# Altium PCB 28Pins_Schematic_V1I1_PCB.PcbDoc (part 2 of 5)
Units mm, origin at the board's own origin, x right, y up, seen from the top; angles counter-clockwise.
Board outline 68.58 x 53.34 mm, 2 copper layers (L1, L2), stack 1.67 mm thick; 106 components, 72 nets, 323 pads, 86 vias.
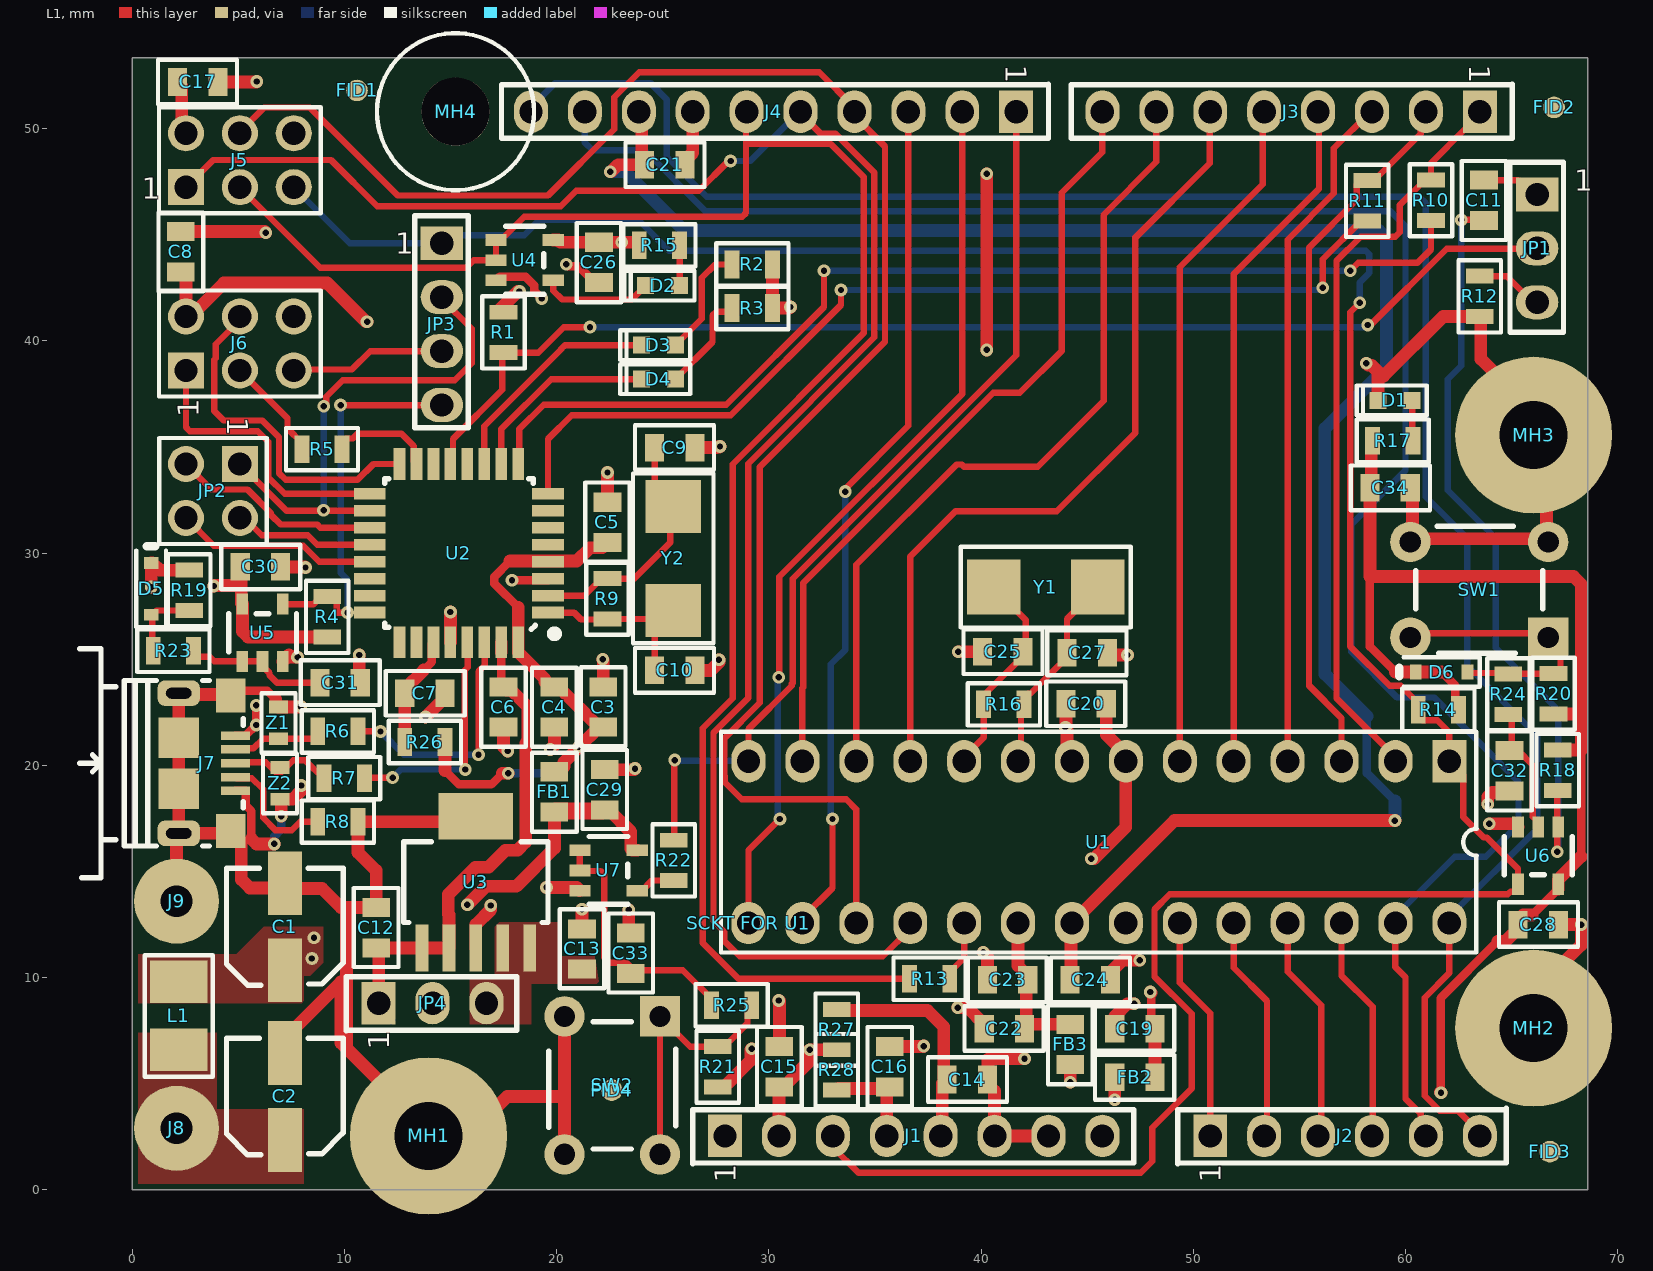
[diagram p0: L1 view]

## Part data (continued)
D5 D6: "Small Signal Schottky Diode, Single, 30 V, 200 Ma, 800 Mv, 600 Ma, 150 C", Average Rectified Current=200mA, Breakdown Voltage=30V, Capacitance=10pF, Forward Voltage=240mV, Manufacturer=onsemi, Manufacturer Lifecycle Status=ACTIVE, Max Forward Surge Current (Ifsm)=600mA, Max Operating Temperature=150°C, Max Power Dissipation=200mW, Max Reverse Leakage Current=2µA, Min Operating Temperature=-55°C, Supplier Part Number 1=BAT54HT1GOSDKR-ND, Category="Schottky Diodes", China RoHS=Compliant, ComponentLink1Description=https://datasheet.octopart.com:443/BAT54HT1G-ON-Semiconductor-datasheet-37002776.pdf?src-supplier=Master+Electronics, ComponentLink1URL=https://datasheet.octopart.com:443/BAT54HT1G-ON-Semiconductor-datasheet-37002776.pdf?src-supplier=Master+Electronics, ComponentLink2Description=https://datasheet.octopart.com:443/BAT54HT1G-onsemi-datasheet-189128040.pdf?src-supplier=Master+Electronics, ComponentLink2URL=https://datasheet.octopart.com:443/BAT54HT1G-onsemi-datasheet-189128040.pdf?src-supplier=Master+Electronics, ComponentLink3Description=https://datasheet.octopart.com:443/BAT54HT1G-onsemi-datasheet-180957868.pdf?src-supplier=IHS, ComponentLink3URL=https://datasheet.octopart.com:443/BAT54HT1G-onsemi-datasheet-180957868.pdf?src-supplier=IHS, ComponentLink4Description=https://datasheet.octopart.com:443/BAT54HT1G-Fairchild-Semiconductor-datasheet-21199251.pdf?src-supplier=IHS, ComponentLink4URL=https://datasheet.octopart.com:443/BAT54HT1G-Fairchild-Semiconductor-datasheet-21199251.pdf?src-supplier=IHS, ComponentLink5Description=https://datasheet.octopart.com:443/BAT54HT1G-ON-Semiconductor-datasheet-7594180.pdf?src-supplier=onsemi, ComponentLink5URL=https://datasheet.octopart.com:443/BAT54HT1G-ON-Semiconductor-datasheet-7594180.pdf?src-supplier=onsemi, ComponentLink6Description=https://datasheet.octopart.com:443/BAT54HT1G-onsemi-datasheet-181958672.pdf?src-supplier=Newark, ComponentLink6URL=https://datasheet.octopart.com:443/BAT54HT1G-onsemi-datasheet-181958672.pdf?src-supplier=Newark, ComponentLink7Description=https://datasheet.octopart.com:443/BAT54HT1G-ON-Semiconductor-datasheet-11728044.pdf?src-supplier=Newark, ComponentLink7URL=https://datasheet.octopart.com:443/BAT54HT1G-ON-Semiconductor-datasheet-11728044.pdf?src-supplier=Newark, ComponentLink8Description=https://datasheet.octopart.com:443/BAT54HT1G-Fairchild-Semiconductor-datasheet-67878757.pdf?src-supplier=Newark, ComponentLink8URL=https://datasheet.octopart.com:443/BAT54HT1G-Fairchild-Semiconductor-datasheet-67878757.pdf?src-supplier=Newark, ComponentLink9Description=https://datasheet.octopart.com:443/BAT54HT1G-Fairchild-Semiconductor-datasheet-67910283.pdf?src-supplier=Newark, ComponentLink9URL=https://datasheet.octopart.com:443/BAT54HT1G-Fairchild-Semiconductor-datasheet-67910283.pdf?src-supplier=Newark, ComponentLink10Description=https://datasheet.octopart.com:443/BAT54HT1G-Fairchild-Semiconductor-datasheet-12526481.pdf?src-supplier=Fairchild+Semiconductor, ComponentLink10URL=https://datasheet.octopart.com:443/BAT54HT1G-Fairchild-Semiconductor-datasheet-12526481.pdf?src-supplier=Fairchild+Semiconductor, ComponentLink11Description=https://sigma.octopart.com:443/17344476/technical_drawing/Fairchild-Semiconductor-BAT54HT1G.pdf?src-supplier=Fairchild+Semiconductor, ComponentLink11URL=https://sigma.octopart.com:443/17344476/technical_drawing/Fairchild-Semiconductor-BAT54HT1G.pdf?src-supplier=Fairchild+Semiconductor, ComponentLink12Description=https://datasheet.octopart.com:443/BAT54HT1G-ON-Semiconductor-datasheet-78857375.pdf?src-supplier=element14+APAC, ComponentLink12URL=https://datasheet.octopart.com:443/BAT54HT1G-ON-Semiconductor-datasheet-78857375.pdf?src-supplier=element14+APAC, ComponentLink13Description=https://datasheet.octopart.com:443/BAT54HT1G-Fairchild-Semiconductor-datasheet-14041551.pdf?src-supplier=iiiC, ComponentLink13URL=https://datasheet.octopart.com:443/BAT54HT1G-Fairchild-Semiconductor-datasheet-14041551.pdf?src-supplier=iiiC, ComponentLink14Description=https://datasheet.octopart.com:443/BAT54HT1G-ON-Semiconductor-datasheet-9904951.pdf?src-supplier=RS+(Formerly+Allied+Electronics), ComponentLink14URL=https://datasheet.octopart.com:443/BAT54HT1G-ON-Semiconductor-datasheet-9904951.pdf?src-supplier=RS+(Formerly+Allied+Electronics), ComponentLink15Description=https://datasheet.octopart.com:443/BAT54HT1G-ON-Semiconductor-datasheet-8442547.pdf?src-supplier=Jameco, ComponentLink15URL=https://datasheet.octopart.com:443/BAT54HT1G-ON-Semiconductor-datasheet-8442547.pdf?src-supplier=Jameco, ComponentLink16Description=https://datasheet.octopart.com:443/BAT54HT1G-Fairchild-datasheet-1483.pdf?src-supplier=DigiKey, ComponentLink16URL=https://datasheet.octopart.com:443/BAT54HT1G-Fairchild-datasheet-1483.pdf?src-supplier=DigiKey, ComponentLink17Description=https://datasheet.octopart.com:443/BAT54HT1G-Fairchild-Semiconductor-datasheet-68652800.pdf?src-supplier=Farnell, ComponentLink17URL=https://datasheet.octopart.com:443/BAT54HT1G-Fairchild-Semiconductor-datasheet-68652800.pdf?src-supplier=Farnell, ComponentLink18Description=http://sigma.octopart.com:80/15540786/rohs_certificate/ON-Semiconductor-BAT54HT1G.pdf?src-supplier=Compliance+Statements, ComponentLink18URL=http://sigma.octopart.com:80/15540786/rohs_certificate/ON-Semiconductor-BAT54HT1G.pdf?src-supplier=Compliance+Statements, ComponentLink19Description=http://sigma.octopart.com:80/15674218/materials_sheet/ON-Semiconductor-BAT54HT1G.csv?src-supplier=Compliance+Statements, ComponentLink19URL=http://sigma.octopart.com:80/15674218/materials_sheet/ON-Semiconductor-BAT54HT1G.csv?src-supplier=Compliance+Statements, ComponentLink20Description=http://sigma.octopart.com:80/150604023/rohs_statement/ON-Semiconductor-BAT54HT1G.pdf?src-supplier=Compliance+Statements, ComponentLink20URL=http://sigma.octopart.com:80/150604023/rohs_statement/ON-Semiconductor-BAT54HT1G.pdf?src-supplier=Compliance+Statements, ComponentLink21Description=http://sigma.octopart.com:80/17344520/reach_statement/Fairchild-Semiconductor-BAT54HT1G.pdf?src-supplier=Compliance+Statements, ComponentLink21URL=http://sigma.octopart.com:80/17344520/reach_statement/Fairchild-Semiconductor-BAT54HT1G.pdf?src-supplier=Compliance+Statements, ComponentLink22Description=http://sigma.octopart.com:80/17344521/materials_sheet/Fairchild-Semiconductor-BAT54HT1G.pdf?src-supplier=Compliance+Statements, ComponentLink22URL=http://sigma.octopart.com:80/17344521/materials_sheet/Fairchild-Semiconductor-BAT54HT1G.pdf?src-supplier=Compliance+Statements, ComponentLink23Description=http://sigma.octopart.com:80/33050028/reach_statement/Fairchild-Semiconductor-BAT54HT1G.pdf?src-supplier=Compliance+Statements, ComponentLink23URL=http://sigma.octopart.com:80/33050028/reach_statement/Fairchild-Semiconductor-BAT54HT1G.pdf?src-supplier=Compliance+Statements, ComponentLink24Description=http://sigma.octopart.com:80/33050038/materials_sheet/Fairchild-Semiconductor-BAT54HT1G.pdf?src-supplier=Compliance+Statements, ComponentLink24URL=http://sigma.octopart.com:80/33050038/materials_sheet/Fairchild-Semiconductor-BAT54HT1G.pdf?src-supplier=Compliance+Statements, ComponentLink25Description=http://sigma.octopart.com:80/reach_statement/ON-Semiconductor-company-79.pdf?src-supplier=Compliance+Statements, ComponentLink25URL=http://sigma.octopart.com:80/reach_statement/ON-Semiconductor-company-79.pdf?src-supplier=Compliance+Statements, ComponentLink26Description=http://sigma.octopart.com:80/reach_statement/Fairchild-Semiconductor-company-9.pdf?src-supplier=Compliance+Statements, ComponentLink26URL=http://sigma.octopart.com:80/reach_statement/Fairchild-Semiconductor-company-9.pdf?src-supplier=Compliance+Statements, ComponentLink27Description=http://sigma.octopart.com:80/rohs_statement/Fairchild-Semiconductor-company-10.pdf?src-supplier=Compliance+Statements, ComponentLink27URL=http://sigma.octopart.com:80/rohs_statement/Fairchild-Semiconductor-company-10.pdf?src-supplier=Compliance+Statements, ComponentLink28Description=http://sigma.octopart.com:80/rohs_statement/Fairchild-Semiconductor-company-11.pdf?src-supplier=Compliance+Statements, ComponentLink28URL=http://sigma.octopart.com:80/rohs_statement/Fairchild-Semiconductor-company-11.pdf?src-supplier=Compliance+Statements, ComponentLink29Description=https://octopart.com:443/opatz8j6/c1?t=3ZzLXgp189lN6qr6PJ87cZKlXV5_f8kPbvVlEFRlOjs67Qhaku54BR-AgYIUP67cujvA7wDJKydF2OiBQY6EYp4nMlrwEMh3oQTbWkdpaRVxum8woBCyxPnJ0sWb7LRm_eEFT5Fosxf2ScgU6zJALxGwwzG5iEq8gNK_bSef5qdATf5-mKg7ZOWVi3aB1zkTrJTwfRWh1CT_VDojxVyUEyHMmg70DbBu-Ut1n5vHLUqdX7RI8hTTVEtl94J2wzp4T5HhO6ImYDlBu9_FMTDHXSlJWvsKofChh7O756G4mXutxmrsS2trYwzw5_jJNJSRrFQky3Dqp2UF_-WeSnumXBPkE1b1s1RoEA&src-supplier=Compliance+Statements, ComponentLink29URL=https://octopart.com:443/opatz8j6/c1?t=3ZzLXgp189lN6qr6PJ87cZKlXV5_f8kPbvVlEFRlOjs67Qhaku54BR-AgYIUP67cujvA7wDJKydF2OiBQY6EYp4nMlrwEMh3oQTbWkdpaRVxum8woBCyxPnJ0sWb7LRm_eEFT5Fosxf2ScgU6zJALxGwwzG5iEq8gNK_bSef5qdATf5-mKg7ZOWVi3aB1zkTrJTwfRWh1CT_VDojxVyUEyHMmg70DbBu-Ut1n5vHLUqdX7RI8hTTVEtl94J2wzp4T5HhO6ImYDlBu9_FMTDHXSlJWvsKofChh7O756G4mXutxmrsS2trYwzw5_jJNJSRrFQky3Dqp2UF_-WeSnumXBPkE1b1s1RoEA&src-supplier=Compliance+Statements, ComponentLink30Description=https://octopart.com:443/opatz8j6/c1?t=lBzE7Y_ANC3iKkVfA73D4dlUe9RzUzslg6-n76YkGyK5ZeirIztsOHEAxBuNpZVXn9OPcjJdutwzpwHYmI55AnVX10rWYzr5fzPXsvkuk1qDsHog-eNghcNEOv3ETbmy9xFgtDtXVOkXjgojvr30ZGnwQe-SuvxUL4clDHTA93ejFh2pe_CChVNWQhZ3JHhTB-yEKWS8Lk-05QM7OneGtI4KrximWxWcmOzdFy60giGSBPWEO7T8nN0V9HRoymEUY1Z6I1MqG8eWVSRdVHHcB0Awo462-FC4YrhEYLfSGAwDR7gEXYuBkBsslNEJyDaBtgtFiPHlHtStHOe6ouHvctlaLh4vxXNSgpM&src-supplier=Compliance+Statements, ComponentLink30URL=https://octopart.com:443/opatz8j6/c1?t=lBzE7Y_ANC3iKkVfA73D4dlUe9RzUzslg6-n76YkGyK5ZeirIztsOHEAxBuNpZVXn9OPcjJdutwzpwHYmI55AnVX10rWYzr5fzPXsvkuk1qDsHog-eNghcNEOv3ETbmy9xFgtDtXVOkXjgojvr30ZGnwQe-SuvxUL4clDHTA93ejFh2pe_CChVNWQhZ3JHhTB-yEKWS8Lk-05QM7OneGtI4KrximWxWcmOzdFy60giGSBPWEO7T8nN0V9HRoymEUY1Z6I1MqG8eWVSRdVHHcB0Awo462-FC4YrhEYLfSGAwDR7gEXYuBkBsslNEJyDaBtgtFiPHlHtStHOe6ouHvctlaLh4vxXNSgpM&src-supplier=Compliance+Statements, Contact Plating=Tin, Current Rating=200mA, Element Configuration=Single, Forward Current=200mA, Height=1mm, Lead Free="Lead Free", Length=1.8mm, Lifecycle Status=Production, Manufacturer Part Number=BAT54HT1G, Max Output Current=200mA, Max Repetitive Reverse Voltage (Vrrm)=30V, Max Reverse Voltage (DC)=30V, Max Surge Current=600mA, Mount="Surface Mount", Number of Elements=1, Number of Pins=2, Number of Terminals=2, Output Current=200mA, Packaging="Tape and Reel", Peak Non-Repetitive Surge Current=600mA, Peak Reverse Current=2µA, Polarity=Standard, Power Dissipation=200mW, Pricing 1="1=0.11, 10=0.061, 100=0.0512, 500=0.03702, 1000=0.0324 (USD)", Radiation Hardening=No, REACH SVHC=Yes, Recovery Time=5ns, Reverse Recovery Time=5ns, Reverse Standoff Voltage=30V, Reverse Voltage=30V, RoHS=Compliant, Schedule B="8541100070, 8541100070|8541100070|8541100070|8541100070|8541100070", Stock 1=231457, Supplier 1=DigiKey, Voltage Rating (DC)=30V, Width=1.35mm
FB1 FB2 FB3: "Ferrite Beads Multi-Layer Power 600Ohm 25% 100MHz 2A 100mOhm DCR 0805 T/R", Case Code (Imperial)=0805, Case Code (Metric)=2012, Current Rating=2A, DC Resistance (DCR)=100mΩ, Manufacturer=TDK, Manufacturer Lifecycle Status=PRODUCTION, Max Frequency=100MHz, Max Operating Temperature=125°C, Min Operating Temperature=-55°C, Supplier Part Number 1=445-MPZ2012S601AT000CT-ND, Tolerance=25%, Case/Package=0805, Category="Ferrite Beads and Chips", China RoHS=Compliant, ComponentLink1Description=https://datasheet.octopart.com:443/MPZ2012S601AT000-TDK-datasheet-155380320.pdf?src-supplier=ODG+(Origin+Data+Global), ComponentLink1URL=https://datasheet.octopart.com:443/MPZ2012S601AT000-TDK-datasheet-155380320.pdf?src-supplier=ODG+(Origin+Data+Global), ComponentLink2Description=https://datasheet.octopart.com:443/MPZ2012S601AT000-TDK-datasheet-166558464.pdf?src-supplier=Farnell, ComponentLink2URL=https://datasheet.octopart.com:443/MPZ2012S601AT000-TDK-datasheet-166558464.pdf?src-supplier=Farnell, ComponentLink3Description=https://datasheet.octopart.com:443/MPZ2012S601AT000-TDK-datasheet-12512619.pdf?src-supplier=Farnell, ComponentLink3URL=https://datasheet.octopart.com:443/MPZ2012S601AT000-TDK-datasheet-12512619.pdf?src-supplier=Farnell, ComponentLink4Description=https://datasheet.octopart.com:443/MPZ2012S601AT000-TDK-datasheet-8365394.pdf?src-supplier=Farnell, ComponentLink4URL=https://datasheet.octopart.com:443/MPZ2012S601AT000-TDK-datasheet-8365394.pdf?src-supplier=Farnell, ComponentLink5Description=https://datasheet.octopart.com:443/MPZ2012S601AT000-TDK-datasheet-7554990.pdf?src-supplier=Farnell, ComponentLink5URL=https://datasheet.octopart.com:443/MPZ2012S601AT000-TDK-datasheet-7554990.pdf?src-supplier=Farnell, ComponentLink6Description=https://datasheet.octopart.com:443/MPZ2012S601AT000-TDK-datasheet-39118740.pdf?src-supplier=Upverter, ComponentLink6URL=https://datasheet.octopart.com:443/MPZ2012S601AT000-TDK-datasheet-39118740.pdf?src-supplier=Upverter, ComponentLink7Description=https://datasheet.octopart.com:443/MPZ2012S601AT000-TDK-datasheet-82475261.pdf?src-supplier=Newark, ComponentLink7URL=https://datasheet.octopart.com:443/MPZ2012S601AT000-TDK-datasheet-82475261.pdf?src-supplier=Newark, ComponentLink8Description=https://datasheet.octopart.com:443/MPZ2012S601AT000-TDK-datasheet-41739209.pdf?src-supplier=Newark, ComponentLink8URL=https://datasheet.octopart.com:443/MPZ2012S601AT000-TDK-datasheet-41739209.pdf?src-supplier=Newark, ComponentLink9Description=https://datasheet.octopart.com:443/MPZ2012S601AT000-TDK-datasheet-21218011.pdf?src-supplier=Newark, ComponentLink9URL=https://datasheet.octopart.com:443/MPZ2012S601AT000-TDK-datasheet-21218011.pdf?src-supplier=Newark, ComponentLink10Description=https://datasheet.octopart.com:443/MPZ2012S601AT000-TDK-datasheet-21631858.pdf?src-supplier=Future+Electronics, ComponentLink10URL=https://datasheet.octopart.com:443/MPZ2012S601AT000-TDK-datasheet-21631858.pdf?src-supplier=Future+Electronics, ComponentLink11Description=https://datasheet.octopart.com:443/MPZ2012S601AT000-TDK-datasheet-62109747.pdf?src-supplier=Electro+Sonic, ComponentLink11URL=https://datasheet.octopart.com:443/MPZ2012S601AT000-TDK-datasheet-62109747.pdf?src-supplier=Electro+Sonic, ComponentLink12Description=https://datasheet.octopart.com:443/MPZ2012S601AT000-TDK-datasheet-155118627.pdf?src-supplier=Master+Electronics, ComponentLink12URL=https://datasheet.octopart.com:443/MPZ2012S601AT000-TDK-datasheet-155118627.pdf?src-supplier=Master+Electronics, Core Material=Ferrite, Height=850µm, Impedance=600Ω, Lead Free="Lead Free", Length=2mm, Lifecycle Status=Production, Manufacturer Part Number=MPZ2012S601AT000, Max DC Current=2A, Max Length=2.2mm, Max Width=1.45mm, Min Length=1.8mm, Min Width=1.05mm, Mount="Surface Mount", Number of Circuits=1, Packaging="Tape and Reel", Pricing 1="1=0.1, 10=0.073, 25=0.0636, 50=0.057, 100=0.051, 250=0.04392, 500=0.03902, 1000=0.0345, 4000=0.02756, 8000=0.02376, 12000=0.02288 (USD)", REACH SVHC=Yes, Resistance=100mΩ, RMS Current (Irms)=2A, RoHS=Compliant, Schedule B="8504500000, 8504500000|8504500000|8504500000|8504500000|8504500000", Series Resistance=100mΩ, Stock 1=577984, Supplier 1=DigiKey, Test Frequency=100MHz, Width=1.25mm
FID1 FID2 FID3 FID4: "Fiducial 40mil Diameter,120 mil mask"
J1 J3: library part M20-7820842, "2.54mm (0.1) Pitch SIL Vertical PC Tail Socket Assembly, selective gold + tin, 8 contacts\"", Case/Package=SIL, Color=Black, Contact Resistance=20mΩ, Current Rating=3A, Dielectric Material=Polyamide, Insulation Resistance=1GΩ, Manufacturer=Harwin, Max Operating Temperature=105°C, Min Operating Temperature=-40°C, Supplier Part Number 1=952-1823-ND, Category="Card Edge Connectors", ComponentLink1Description=https://datasheet.octopart.com:443/M20-7820842-Harwin-datasheet-176383844.pdf?src-supplier=Newark, ComponentLink1URL=https://datasheet.octopart.com:443/M20-7820842-Harwin-datasheet-176383844.pdf?src-supplier=Newark, ComponentLink2Description=https://datasheet.octopart.com:443/M20-7820842-Harwin-datasheet-99119574.pdf?src-supplier=Master+Electronics, ComponentLink2URL=https://datasheet.octopart.com:443/M20-7820842-Harwin-datasheet-99119574.pdf?src-supplier=Master+Electronics, ComponentLink3Description=http://sigma.octopart.com:80/15888290/rohs_statement/Harwin-M20-7820842.pdf?src-supplier=Compliance+Statements, ComponentLink3URL=http://sigma.octopart.com:80/15888290/rohs_statement/Harwin-M20-7820842.pdf?src-supplier=Compliance+Statements, Connector Type="Receptacle, Socket", Contact Gender=Female, Contact Material=Bronze, Contact Plating="Gold, Tin", Depth=2.5mm, Gender=Female, Housing Color=Black, Housing Material=Polyamide, Length=20.72mm, Lifecycle Status=Production, Manufacturer Part Number=M20-7820842, Max Current Rating=3A, Mount="Through Hole", Number of Contacts=8, Number of Pins=8, Number of Positions=8, Number of Rows=1, Orientation=Straight, Pitch=2.54mm, Pricing 1="1=1.27, 27=1.0063, 108=0.91231, 513=0.81725, 1026=0.77824, 5022=0.69577, 10017=0.66272 (USD)", Radiation Hardening=No, REACH SVHC=Yes, RoHS=Compliant, Stock 1=1248, Supplier 1=DigiKey, Terminal Pitch=2.54mm, Termination=Solder, Weight=719.992839mg
J2: library part M20-7820646, "Conn Socket Strip Receptacle 6 Position 2.54mm Solder Straight Through Hole Tube", Case/Package=SIL, Color=Black, Contact Resistance=20mΩ, Current Rating=3A, Dielectric Material=Polyamide, Insulation Resistance=1GΩ, Manufacturer=Harwin, Max Operating Temperature=105°C, Min Operating Temperature=-40°C, Supplier Part Number 1=952-1809-ND, Category="Card Edge Connectors", ComponentLink1Description=https://datasheet.octopart.com:443/M20-7820646-Harwin-datasheet-176383844.pdf?src-supplier=Newark, ComponentLink1URL=https://datasheet.octopart.com:443/M20-7820646-Harwin-datasheet-176383844.pdf?src-supplier=Newark, ComponentLink2Description=https://datasheet.octopart.com:443/M20-7820646-Harwin-datasheet-99119574.pdf?src-supplier=Farnell, ComponentLink2URL=https://datasheet.octopart.com:443/M20-7820646-Harwin-datasheet-99119574.pdf?src-supplier=Farnell, ComponentLink3Description=https://datasheet.octopart.com:443/M20-7820646-Harwin-datasheet-188872139.pdf?src-supplier=TME, ComponentLink3URL=https://datasheet.octopart.com:443/M20-7820646-Harwin-datasheet-188872139.pdf?src-supplier=TME, ComponentLink4Description=https://datasheet.octopart.com:443/M20-7820646-Harwin-datasheet-137074310.pdf?src-supplier=X-ON, ComponentLink4URL=https://datasheet.octopart.com:443/M20-7820646-Harwin-datasheet-137074310.pdf?src-supplier=X-ON, ComponentLink5Description=http://sigma.octopart.com:80/15888285/rohs_statement/Harwin-M20-7820646.pdf?src-supplier=Compliance+Statements, ComponentLink5URL=http://sigma.octopart.com:80/15888285/rohs_statement/Harwin-M20-7820646.pdf?src-supplier=Compliance+Statements, Connector Type="Receptacle, Socket", Contact Gender=Female, Contact Material=Bronze, Contact Plating=Tin, Depth=2.5mm, Gender=Female, Housing Color=Black, Housing Material=Nylon, Length=15.64mm, Lifecycle Status=Production, Manufacturer Part Number=M20-7820646, Max Current Rating=3A, Mount="Through Hole", Number of Contacts=6, Number of Pins=6, Number of Positions=6, Number of Rows=1, Orientation=Straight, Pitch=2.54mm, Pricing 1="1=1.11, 36=0.86417, 108=0.79954, 504=0.7171, 1008=0.68287, 5004=0.60989, 10008=0.58081 (USD)", Radiation Hardening=No, REACH SVHC=Yes, RoHS=Compliant, Stock 1=1442, Supplier 1=DigiKey, Terminal Pitch=2.54mm, Termination=Solder
J4: library part M20-7821046, "Conn Socket Strip Receptacle 10 Position 2.54mm Solder Straight Through Hole Tube", Case/Package=SIL, Color=Black, Contact Resistance=20mΩ, Current Rating=3A, Dielectric Material=Polyamide, Insulation Resistance=1GΩ, Manufacturer=Harwin, Max Operating Temperature=105°C, Min Operating Temperature=-40°C, Operating Force=4.8928N, Supplier Part Number 1=952-1847-ND, Category="Card Edge Connectors", ComponentLink1Description=https://datasheet.octopart.com:443/M20-7821046-Harwin-datasheet-176383844.pdf?src-supplier=Electro+Sonic, ComponentLink1URL=https://datasheet.octopart.com:443/M20-7821046-Harwin-datasheet-176383844.pdf?src-supplier=Electro+Sonic, ComponentLink2Description=https://datasheet.octopart.com:443/M20-7821046-Harwin-datasheet-99119574.pdf?src-supplier=Upverter, ComponentLink2URL=https://datasheet.octopart.com:443/M20-7821046-Harwin-datasheet-99119574.pdf?src-supplier=Upverter, ComponentLink3Description=https://datasheet.octopart.com:443/M20-7821046-Harwin-datasheet-526273.pdf?src-supplier=Upverter, ComponentLink3URL=https://datasheet.octopart.com:443/M20-7821046-Harwin-datasheet-526273.pdf?src-supplier=Upverter, ComponentLink4Description=https://datasheet.octopart.com:443/M20-7821046-Harwin-datasheet-96624206.pdf?src-supplier=element14+APAC, ComponentLink4URL=https://datasheet.octopart.com:443/M20-7821046-Harwin-datasheet-96624206.pdf?src-supplier=element14+APAC, ComponentLink5Description=https://datasheet.octopart.com:443/M20-7821046-Harwin-datasheet-6396485.pdf?src-supplier=Newark, ComponentLink5URL=https://datasheet.octopart.com:443/M20-7821046-Harwin-datasheet-6396485.pdf?src-supplier=Newark, ComponentLink6Description=https://datasheet.octopart.com:443/M20-7821046-Harwin-datasheet-32864534.pdf?src-supplier=Newark, ComponentLink6URL=https://datasheet.octopart.com:443/M20-7821046-Harwin-datasheet-32864534.pdf?src-supplier=Newark, ComponentLink7Description=https://datasheet.octopart.com:443/M20-7821046-Harwin-datasheet-15888280.pdf?src-supplier=Newark, ComponentLink7URL=https://datasheet.octopart.com:443/M20-7821046-Harwin-datasheet-15888280.pdf?src-supplier=Newark, ComponentLink8Description=https://datasheet.octopart.com:443/M20-7821046-Harwin-datasheet-188872139.pdf?src-supplier=TME, ComponentLink8URL=https://datasheet.octopart.com:443/M20-7821046-Harwin-datasheet-188872139.pdf?src-supplier=TME, ComponentLink9Description=https://datasheet.octopart.com:443/M20-7821046-Harwin-datasheet-14706651.pdf?src-supplier=Farnell, ComponentLink9URL=https://datasheet.octopart.com:443/M20-7821046-Harwin-datasheet-14706651.pdf?src-supplier=Farnell, ComponentLink10Description=http://sigma.octopart.com:80/15888295/rohs_statement/Harwin-M20-7821046.pdf?src-supplier=Compliance+Statements, ComponentLink10URL=http://sigma.octopart.com:80/15888295/rohs_statement/Harwin-M20-7821046.pdf?src-supplier=Compliance+Statements, Connector Type="Receptacle, Socket", Contact Gender=Female, Contact Material=Bronze, Contact Plating=Tin, Depth=2.5mm, Gender=Female, Hole Diameter=800µm, Housing Color=Black, Housing Material=Polyamide, Lead Pitch=2.54mm, Length=25.8mm, Lifecycle Status=Production, Manufacturer Part Number=M20-7821046, Max Current Rating=3A, Mount="Through Hole", Number of Contacts=10, Number of Pins=10, Number of Positions=10, Number of Rows=1, Orientation=Straight, Pitch=2.54mm, Pricing 1="1=1.37, 22=1.10409, 110=0.98555, 506=0.88482, 1012=0.84258, 5016=0.75263, 10010=0.71686 (USD)", Radiation Hardening=No, REACH SVHC=Yes, RoHS=Compliant, Stock 1=1364, Supplier 1=DigiKey, Terminal Pitch=2.54mm, Termination=Solder
J5 J6: library part 67997-106HLF, "Conn; Rect; Header; Unshrouded; 6 Pos; 2.54mm Pitch; 2-Row; Thru-Hole; BergStik", Color=Black, Current Rating=5A, Dielectric Material=Polyethylene, Flammability Rating="UL94 V-0", Insulation Resistance=5GΩ, Manufacturer="Amphenol Communications Solutions", Max Operating Temperature=130°C, Max Voltage Rating (AC)=1.5kV, Min Operating Temperature=-65°C, Supplier Part Number 1=609-3393-ND, Category="Headers and Wire Housings", China RoHS=Compliant, ComponentLink1Description=https://datasheet.octopart.com:443/67997-106HLF-Amphenol-Communications-Solutions-datasheet-10288749.pdf?src-supplier=Newark, ComponentLink1URL=https://datasheet.octopart.com:443/67997-106HLF-Amphenol-Communications-Solutions-datasheet-10288749.pdf?src-supplier=Newark, ComponentLink2Description=https://datasheet.octopart.com:443/67997-106HLF-Areva-datasheet-10052131.pdf?src-supplier=Newark, ComponentLink2URL=https://datasheet.octopart.com:443/67997-106HLF-Areva-datasheet-10052131.pdf?src-supplier=Newark, ComponentLink3Description=https://datasheet.octopart.com:443/67997-106HLF-Areva-datasheet-8877144.pdf?src-supplier=Newark, ComponentLink3URL=https://datasheet.octopart.com:443/67997-106HLF-Areva-datasheet-8877144.pdf?src-supplier=Newark, ComponentLink4Description=https://datasheet.octopart.com:443/67997-106HLF-Areva-datasheet-8731571.pdf?src-supplier=Newark, ComponentLink4URL=https://datasheet.octopart.com:443/67997-106HLF-Areva-datasheet-8731571.pdf?src-supplier=Newark, ComponentLink5Description=https://datasheet.octopart.com:443/67997-106HLF-Areva-datasheet-8486089.pdf?src-supplier=Newark, ComponentLink5URL=https://datasheet.octopart.com:443/67997-106HLF-Areva-datasheet-8486089.pdf?src-supplier=Newark, ComponentLink6Description=https://datasheet.octopart.com:443/67997-106HLF-Amphenol-Communications-Solutions-datasheet-36854132.pdf?src-supplier=Farnell, ComponentLink6URL=https://datasheet.octopart.com:443/67997-106HLF-Amphenol-Communications-Solutions-datasheet-36854132.pdf?src-supplier=Farnell, ComponentLink7Description=https://datasheet.octopart.com:443/67997-106HLF-Amphenol-Communications-Solutions-datasheet-20739478.pdf?src-supplier=RS+(Formerly+Allied+Electronics), ComponentLink7URL=https://datasheet.octopart.com:443/67997-106HLF-Amphenol-Communications-Solutions-datasheet-20739478.pdf?src-supplier=RS+(Formerly+Allied+Electronics), ComponentLink8Description=https://datasheet.octopart.com:443/67997-106HLF-Areva-datasheet-118652.pdf?src-supplier=DigiKey, ComponentLink8URL=https://datasheet.octopart.com:443/67997-106HLF-Areva-datasheet-118652.pdf?src-supplier=DigiKey, Connector Type="Male Pin", Contact Gender=Male, Contact Material=Bronze, Contact Mating Length=5.842mm, Contact Plating=Gold, Depth=4.83mm, Gender=Male, Housing Color=Black, Housing Material=Thermoplastic, Lead Free="Lead Free", Lead Length=3.05mm, Lead Pitch=2.54mm, Length=7.62mm, Lifecycle Status=Production, Manufacturer Part Number=67997-106HLF, Mating Post Length=5.84mm, Mount="Through Hole", Number of Contacts=6, Number of Pins=6, Number of Positions=6, Number of Rows=2, Orientation=Straight, Pitch=2.54mm, Pricing 1="1=0.58, 10=0.49, 400=0.37728, 800=0.35925, 1200=0.34911, 5200=0.31479, 10000=0.3006 (USD)", Radiation Hardening=No, REACH SVHC=Yes, RoHS=Compliant, Row Spacing=2.54mm, Schedule B="8535908040, 8535908040|8535908040|8535908040|8535908040|8535908040|8535908040|8535908040|8535908040|8535908040|8535908040|8535908040|8535908040|8535908040|8535908040|8535908040|8535908040|8535908040|8535908040|8535908040|8535908040|8535908040|8535908040|8535908040|85", Stock 1=4582, Supplier 1=DigiKey, Terminal Pitch=2.54mm, Termination="Through Hole", Voltage Rating=1.5kV
J7: "USB - micro B USB 2.0 Receptacle Connector 5 Position Surface Mount, Right Angle, Horizontal", Color=Black, Contact Resistance=30mΩ, Current Rating=1.8A, Dielectric Material="Liquid Crystal Polymer", Flammability Rating="UL94 V-0", Insulation Resistance=1GΩ, Manufacturer="Amphenol Communications Solutions", Max Operating Temperature=80°C, Max Voltage Rating (AC)=100V, Min Operating Temperature=-55°C, Operating Force=35.1392N, Supplier Part Number 1=609-4616-1-ND, Category="USB Connectors", China RoHS=Compliant, ComponentLink1Description=https://datasheet.octopart.com:443/10118193-0001LF-Amphenol-Communications-Solutions-datasheet-182239125.pdf?src-supplier=IHS, ComponentLink1URL=https://datasheet.octopart.com:443/10118193-0001LF-Amphenol-Communications-Solutions-datasheet-182239125.pdf?src-supplier=IHS, ComponentLink2Description=https://datasheet.octopart.com:443/10118193-0001LF-Amphenol-Communications-Solutions-datasheet-55953155.pdf?src-supplier=TME, ComponentLink2URL=https://datasheet.octopart.com:443/10118193-0001LF-Amphenol-Communications-Solutions-datasheet-55953155.pdf?src-supplier=TME, ComponentLink3Description=https://datasheet.octopart.com:443/10118193-0001LF-Amphenol-ICC-datasheet-116246833.pdf?src-supplier=Upverter, ComponentLink3URL=https://datasheet.octopart.com:443/10118193-0001LF-Amphenol-ICC-datasheet-116246833.pdf?src-supplier=Upverter, ComponentLink4Description=https://datasheet.octopart.com:443/10118193-0001LF-FCI-datasheet-141913714.pdf?src-supplier=Upverter, ComponentLink4URL=https://datasheet.octopart.com:443/10118193-0001LF-FCI-datasheet-141913714.pdf?src-supplier=Upverter, ComponentLink5Description=https://datasheet.octopart.com:443/10118193-0001LF-Amphenol-Communications-Solutions-datasheet-96019471.pdf?src-supplier=element14+APAC, ComponentLink5URL=https://datasheet.octopart.com:443/10118193-0001LF-Amphenol-Communications-Solutions-datasheet-96019471.pdf?src-supplier=element14+APAC, ComponentLink6Description=https://datasheet.octopart.com:443/10118193-0001LF-Amphenol-Communications-Solutions-datasheet-11792339.pdf?src-supplier=Electro+Sonic, ComponentLink6URL=https://datasheet.octopart.com:443/10118193-0001LF-Amphenol-Communications-Solutions-datasheet-11792339.pdf?src-supplier=Electro+Sonic, ComponentLink7Description=https://datasheet.octopart.com:443/10118193-0001LF-Amphenol-Communications-Solutions-datasheet-13702206.pdf?src-supplier=RS+(Formerly+Allied+Electronics), ComponentLink7URL=https://datasheet.octopart.com:443/10118193-0001LF-Amphenol-Communications-Solutions-datasheet-13702206.pdf?src-supplier=RS+(Formerly+Allied+Electronics), Connector Type="Receptacle, USB", Contact Gender=Female, Contact Material="Gold, Nickel", Contact Plating=Gold, Depth=5.67mm, Features=Shielded, Height=3mm, Housing Material=Polymer, Length=7.86mm, Lifecycle Status=Production, Manufacturer Part Number=10118193-0001LF, Mount="Horizontal, Surface Mount", Number of Contacts=5, Number of Pins=5, Number of Ports=1, Number of Rows=1, Number of Terminals=5, Orientation="Right Angle", Pitch=650µm, Plating Thickness=762nm, Pricing 1="1=0.43, 10=0.367, 25=0.3436, 50=0.3272, 100=0.3116, 250=0.29204, 500=0.27808 (USD)", Radiation Hardening=No, REACH SVHC=Yes, RoHS=Compliant, Shell Material="Stainless Steel", Stock 1=78879, Supplier 1=DigiKey, Terminal Pitch=660.4µm, Termination=Solder, USB Standard="USB 2.0", Voltage Rating=100V
J8 J9: library part PAD_WITH_HOLE_4MMx1.5MM, "pad with hole 4mmx1.5mm"
JP1 JP4: library part 68000-103HLF, "Conn Unshrouded Header HDR 3 POS 2.54mm Solder ST Top Entry Thru-Hole BergStik® Bulk", Color=Black, Current Rating=3A, Dielectric Material=Polyethylene, Flammability Rating="UL94 V-0", Insulation Resistance=5GΩ, Manufacturer="Amphenol Communications Solutions", Max Operating Temperature=125°C, Max Voltage Rating (AC)=1.5kV, Min Operating Temperature=-65°C, Supplier Part Number 1=609-3461-ND, Voltage Rating=1.05kV, Category="Headers and Wire Housings", China RoHS=Compliant, ComponentLink1Description=https://datasheet.octopart.com:443/68000-103HLF-Amphenol-ICC---FCI-datasheet-155511504.pdf?src-supplier=Upverter, ComponentLink1URL=https://datasheet.octopart.com:443/68000-103HLF-Amphenol-ICC---FCI-datasheet-155511504.pdf?src-supplier=Upverter, ComponentLink2Description=https://datasheet.octopart.com:443/68000-103HLF-Amphenol-Communications-Solutions-datasheet-10088795.pdf?src-supplier=Farnell, ComponentLink2URL=https://datasheet.octopart.com:443/68000-103HLF-Amphenol-Communications-Solutions-datasheet-10088795.pdf?src-supplier=Farnell, ComponentLink3Description=https://datasheet.octopart.com:443/68000-103HLF-Amphenol-Communications-Solutions-datasheet-41232361.pdf?src-supplier=Farnell, ComponentLink3URL=https://datasheet.octopart.com:443/68000-103HLF-Amphenol-Communications-Solutions-datasheet-41232361.pdf?src-supplier=Farnell, ComponentLink4Description=https://datasheet.octopart.com:443/68000-103HLF-Areva-datasheet-8861575.pdf?src-supplier=Newark, ComponentLink4URL=https://datasheet.octopart.com:443/68000-103HLF-Areva-datasheet-8861575.pdf?src-supplier=Newark, ComponentLink5Description=https://datasheet.octopart.com:443/68000-103HLF-Areva-datasheet-8713716.pdf?src-supplier=Newark, ComponentLink5URL=https://datasheet.octopart.com:443/68000-103HLF-Areva-datasheet-8713716.pdf?src-supplier=Newark, ComponentLink6Description=https://datasheet.octopart.com:443/68000-103HLF-Areva-datasheet-8449737.pdf?src-supplier=Newark, ComponentLink6URL=https://datasheet.octopart.com:443/68000-103HLF-Areva-datasheet-8449737.pdf?src-supplier=Newark, ComponentLink7Description=https://datasheet.octopart.com:443/68000-103HLF-Amphenol-Communications-Solutions-datasheet-154727322.pdf?src-supplier=Electro+Sonic, ComponentLink7URL=https://datasheet.octopart.com:443/68000-103HLF-Amphenol-Communications-Solutions-datasheet-154727322.pdf?src-supplier=Electro+Sonic, ComponentLink8Description=https://datasheet.octopart.com:443/68000-103HLF-Amphenol-Communications-Solutions-datasheet-100449246.pdf?src-supplier=TME, ComponentLink8URL=https://datasheet.octopart.com:443/68000-103HLF-Amphenol-Communications-Solutions-datasheet-100449246.pdf?src-supplier=TME, ComponentLink9Description=https://datasheet.octopart.com:443/68000-103HLF-Amphenol-datasheet-170317325.pdf?src-supplier=Amar+Radio+Corporation, ComponentLink9URL=https://datasheet.octopart.com:443/68000-103HLF-Amphenol-datasheet-170317325.pdf?src-supplier=Amar+Radio+Corporation, ComponentLink10Description=https://datasheet.octopart.com:443/68000-103HLF-Amphenol-Communications-Solutions-datasheet-13448982.pdf?src-supplier=RS+(Formerly+Allied+Electronics), ComponentLink10URL=https://datasheet.octopart.com:443/68000-103HLF-Amphenol-Communications-Solutions-datasheet-13448982.pdf?src-supplier=RS+(Formerly+Allied+Electronics), Connector Type="Male Pin", Contact Gender=Male, Contact Material=Gold, Contact Mating Length=5.842mm, Contact Plating=Gold, Depth=2.41mm, Gender=Male, Height=8.73mm, Housing Color=Black, Housing Material=Thermoplastic, Lead Length=2.41mm, Lead Pitch=2.54mm, Length=7.62mm, Lifecycle Status=Production, Manufacturer Part Number=68000-103HLF, Mating Post Length=5.84mm, Mount="Through Hole", Number of Contacts=3, Number of Pins=3, Number of Positions=3, Number of Rows=1, Orientation=Straight, Packaging=Bulk, Pitch=2.54mm, Plating Thickness=762nm, Pricing 1="1=0.31, 10=0.266, 100=0.2257, 500=0.20142, 4000=0.17391, 8000=0.1656, 12000=0.16093 (USD)", Radiation Hardening=No, REACH SVHC=Yes, RoHS=Compliant, Stock 1=66241, Supplier 1=DigiKey, Terminal Pitch=2.54mm, Termination=Solder
JP2: library part 68602-404HLF, "Conn Unshrouded Header HDR 4 POS 2.54mm Solder ST Thru-Hole Poly Bag", Color=Black, Current Rating=3A, Dielectric Material=Polyethylene, Flammability Rating="UL94 V-0", Insulation Resistance=5GΩ, Manufacturer="Amphenol Communications Solutions", Max Operating Temperature=130°C, Min Operating Temperature=-65°C, Supplier Part Number 1=609-3379-ND, Voltage Rating=1.5kV, Category="Headers and Wire Housings", ComponentLink1Description=https://datasheet.octopart.com:443/68602-404HLF-Amphenol-Communications-Solutions-datasheet-168215120.pdf?src-supplier=IHS, ComponentLink1URL=https://datasheet.octopart.com:443/68602-404HLF-Amphenol-Communications-Solutions-datasheet-168215120.pdf?src-supplier=IHS, ComponentLink2Description=https://datasheet.octopart.com:443/68602-404HLF-Amphenol-Communications-Solutions-datasheet-36854132.pdf?src-supplier=Newark, ComponentLink2URL=https://datasheet.octopart.com:443/68602-404HLF-Amphenol-Communications-Solutions-datasheet-36854132.pdf?src-supplier=Newark, ComponentLink3Description=https://datasheet.octopart.com:443/68602-404HLF-Amphenol-datasheet-170317325.pdf?src-supplier=Amar+Radio+Corporation, ComponentLink3URL=https://datasheet.octopart.com:443/68602-404HLF-Amphenol-datasheet-170317325.pdf?src-supplier=Amar+Radio+Corporation, Connector Type="Male Pin", Contact Gender=Male, Contact Material=Bronze, Contact Mating Length=5.842mm, Contact Plating=Tin, Gender=Male, Housing Material=Thermoplastic, Lead Length=3.81mm, Lifecycle Status=Production, Manufacturer Part Number=68602-404HLF, Mating Post Length=5.84mm, Mount="Through Hole", Number of Contacts=4, Number of Pins=4, Number of Positions=4, Number of Rows=2, Packaging=Bulk, Pitch=2.54mm, Plating Thickness=2.54µm, Pricing 1="1=0.29, 10=0.244, 100=0.2073, 500=0.185, 1000=0.17616, 5000=0.15724, 10000=0.14974 (USD)", Radiation Hardening=No, REACH SVHC=Yes, RoHS=Compliant, Row Spacing=2.54mm, Schedule B="8535908040, 8535908040|8535908040|8535908040|8535908040|8535908040", Stock 1=1721, Supplier 1=DigiKey, Terminal Pitch=2.54mm, Termination=Solder
JP3: library part 68001-204HLF, "Conn Unshrouded Header HDR 4 POS 2.54mm Solder ST Top Entry Thru-Hole BergStik® Bulk", Color=Black, Current Rating=3A, Flammability Rating="UL94 V-0", Insulation Resistance=5GΩ, Manufacturer="Amphenol Communications Solutions", Max Operating Temperature=130°C, Min Operating Temperature=-65°C, Supplier Part Number 1=609-3402-ND, Voltage Rating=1.5kV, Category="Headers and Wire Housings", China RoHS=Compliant, ComponentLink1Description=https://datasheet.octopart.com:443/68001-204HLF-Amphenol-Communications-Solutions-datasheet-151206381.pdf?src-supplier=IHS, ComponentLink1URL=https://datasheet.octopart.com:443/68001-204HLF-Amphenol-Communications-Solutions-datasheet-151206381.pdf?src-supplier=IHS, ComponentLink2Description=https://datasheet.octopart.com:443/68001-204HLF-Amphenol-Communications-Solutions-datasheet-154727322.pdf?src-supplier=Master+Electronics, ComponentLink2URL=https://datasheet.octopart.com:443/68001-204HLF-Amphenol-Communications-Solutions-datasheet-154727322.pdf?src-supplier=Master+Electronics, ComponentLink3Description=https://datasheet.octopart.com:443/68001-204HLF-Amphenol-Communications-Solutions-datasheet-41232361.pdf?src-supplier=element14+APAC, ComponentLink3URL=https://datasheet.octopart.com:443/68001-204HLF-Amphenol-Communications-Solutions-datasheet-41232361.pdf?src-supplier=element14+APAC, ComponentLink4Description=https://datasheet.octopart.com:443/68001-204HLF-Amphenol-Communications-Solutions-datasheet-100449246.pdf?src-supplier=Future+Electronics, ComponentLink4URL=https://datasheet.octopart.com:443/68001-204HLF-Amphenol-Communications-Solutions-datasheet-100449246.pdf?src-supplier=Future+Electronics, ComponentLink5Description=https://datasheet.octopart.com:443/68001-204HLF-Amphenol-Communications-Solutions-datasheet-20739502.pdf?src-supplier=RS+(Formerly+Allied+Electronics), ComponentLink5URL=https://datasheet.octopart.com:443/68001-204HLF-Amphenol-Communications-Solutions-datasheet-20739502.pdf?src-supplier=RS+(Formerly+Allied+Electronics), Connector Type="Male Pin", Contact Gender=Male, Contact Material=Bronze, Contact Mating Length=5.842mm, Contact Plating="GXT, Gold", Gender=Male, Housing Material=Thermoplastic, Lead Length=3.05mm, Lead Pitch=2.54mm, Lifecycle Status=Production, Manufacturer Part Number=68001-204HLF, Mating Post Length=5.84mm, Mount="Through Hole", Number of Contacts=4, Number of Pins=4, Number of Positions=4, Number of Rows=1, Orientation=Straight, Packaging=Bulk, Pitch=2.54mm, Pricing 1="1=0.47, 10=0.401, 100=0.3406, 500=0.30394, 1000=0.28942, 5000=0.25834, 10000=0.24602 (USD)", Radiation Hardening=No, REACH SVHC=Yes, RoHS=Compliant, Schedule B=8535908040, Stock 1=2342, Supplier 1=DigiKey, Terminal Pitch=2.54mm, Termination=Solder
L1: library part L0603B2R2MPWFT, "General Purpose Inductor, 2.2uH, 20%, 1 Element, Ferrite-Core, SMD, 0603", Case/Package=0603, DC Current=430mA, DC Resistance (DCR)=330mΩ, Inductance=2.2µH, Manufacturer=KEMET, Max Operating Temperature=105°C, Min Operating Temperature=-25°C, Self Resonant Frequency=70MHz, Supplier Part Number 1=399-17782-1-ND, Test Frequency=7.96MHz, Tolerance=20%, Category="Fixed Inductors", ComponentLink1Description=https://datasheet.octopart.com:443/L0603B2R2MPWFT-KEMET-datasheet-13696102.pdf?src-supplier=IHS, ComponentLink1URL=https://datasheet.octopart.com:443/L0603B2R2MPWFT-KEMET-datasheet-13696102.pdf?src-supplier=IHS, Composition=Ceramic, Core Material=Ferrite, Depth=900µm, Height=800µm, Length=1.6mm, Lifecycle Status=Obsolete, Manufacturer Part Number=L0603B2R2MPWFT, Max Current Rating=430mA, Max DC Current=430mA, Military Standard=Not, Number of Circuits=1, Number of Terminals=2, Pricing 1="1=0.26, 10=0.212, 100=0.1745, 1000=0.14353 (USD)", REACH SVHC=Yes, RoHS=Compliant, Shielding=No, Stock 1=2105, Supplier 1=DigiKey, Termination=SMD/SMT, Width=800µm
MH1 MH2 MH3: "mounting holde 7.4mm Diameter,3.2mm Drill"
MH4: "mounting hole non copper 7.4mm Diameter,3.2mm Drill NPTH"
R1: library part RC0805FR-07100KP, "General Purpose Chip Resistor Thick Film 0805 100kOhm 1% Paper T/R", Manufacturer="Yageo Group", Max Operating Temperature=155°C, Min Operating Temperature=-55°C, Power Dissipation=125mW, Resistance=100kΩ, Supplier Part Number 1=13-RC0805FR-07100KPCT-ND, Temperature Coefficient=100ppm/°C, Tolerance=1%, Working Voltage=150V, Category="Chip SMD Resistors", China RoHS=Compliant, ComponentLink1Description=https://datasheet.octopart.com:443/RC0805FR-07100KP-Yageo-datasheet-182189537.pdf?src-supplier=IHS, ComponentLink1URL=https://datasheet.octopart.com:443/RC0805FR-07100KP-Yageo-datasheet-182189537.pdf?src-supplier=IHS, ComponentLink2Description=https://datasheet.octopart.com:443/RC0805FR-07100KP-Yageo-datasheet-176147777.pdf?src-supplier=Farnell, ComponentLink2URL=https://datasheet.octopart.com:443/RC0805FR-07100KP-Yageo-datasheet-176147777.pdf?src-supplier=Farnell, ComponentLink3Description=https://datasheet.octopart.com:443/RC0805FR-07100KP-Yageo-datasheet-165786347.pdf?src-supplier=Future+Electronics, ComponentLink3URL=https://datasheet.octopart.com:443/RC0805FR-07100KP-Yageo-datasheet-165786347.pdf?src-supplier=Future+Electronics, ComponentLink4Description=http://sigma.octopart.com:80/rohs_statement/Yageo-company-2.pdf?src-supplier=Compliance+Statements, ComponentLink4URL=http://sigma.octopart.com:80/rohs_statement/Yageo-company-2.pdf?src-supplier=Compliance+Statements, ComponentLink5Description=http://sigma.octopart.com:80/conflict_mineral_statement/Yageo-company-3.pdf?src-supplier=Compliance+Statements, ComponentLink5URL=http://sigma.octopart.com:80/conflict_mineral_statement/Yageo-company-3.pdf?src-supplier=Compliance+Statements, Height=500µm, Lifecycle Status=Production, Manufacturer Part Number=RC0805FR-07100KP, Mount="Surface Mount", Number of Terminals=2, Pricing 1="1=0.11, 10=0.014, 25=0.0136, 50=0.0132, 100=0.0132 (USD)", REACH SVHC=Yes, RoHS=Compliant, Stock 1=1449, Supplier 1=DigiKey, Width=1.25mm
R2 R3 R15 R17 R22: library part RC0805FR-07560RL, "Res Thick Film 0805 560 Ohm 1% 0.125W(1/8W) ±100ppm/C Pad SMD T/R", Case Code (Imperial)=0805, Manufacturer="Yageo Group", Max Operating Temperature=155°C, Max Power Dissipation=125mW, Min Operating Temperature=-55°C, Resistance=560Ω, Supplier Part Number 1=311-560CRCT-ND, Temperature Coefficient=100ppm/°C, Tolerance=1%, Voltage Rating=150V, Case/Package=0805, Category="Chip SMD Resistors", China RoHS=Non-Compliant, ComponentLink1Description=https://datasheet.octopart.com:443/RC0805FR-07560RL-Yageo-datasheet-175887523.pdf?src-supplier=Newark, ComponentLink1URL=https://datasheet.octopart.com:443/RC0805FR-07560RL-Yageo-datasheet-175887523.pdf?src-supplier=Newark, ComponentLink2Description=https://datasheet.octopart.com:443/RC0805FR-07560RL-Yageo-datasheet-8328172.pdf?src-supplier=Newark, ComponentLink2URL=https://datasheet.octopart.com:443/RC0805FR-07560RL-Yageo-datasheet-8328172.pdf?src-supplier=Newark, ComponentLink3Description=https://datasheet.octopart.com:443/RC0805FR-07560RL-Yageo-datasheet-103092701.pdf?src-supplier=Upverter, ComponentLink3URL=https://datasheet.octopart.com:443/RC0805FR-07560RL-Yageo-datasheet-103092701.pdf?src-supplier=Upverter, ComponentLink4Description=https://datasheet.octopart.com:443/RC0805FR-07560RL-Yageo-datasheet-8330313.pdf?src-supplier=element14+APAC, ComponentLink4URL=https://datasheet.octopart.com:443/RC0805FR-07560RL-Yageo-datasheet-8330313.pdf?src-supplier=element14+APAC, ComponentLink5Description=https://datasheet.octopart.com:443/RC0805FR-07560RL-Yageo-datasheet-62067350.pdf?src-supplier=element14+APAC, ComponentLink5URL=https://datasheet.octopart.com:443/RC0805FR-07560RL-Yageo-datasheet-62067350.pdf?src-supplier=element14+APAC, ComponentLink6Description=https://datasheet.octopart.com:443/RC0805FR-07560RL-Yageo-datasheet-164759695.pdf?src-supplier=Future+Electronics, ComponentLink6URL=https://datasheet.octopart.com:443/RC0805FR-07560RL-Yageo-datasheet-164759695.pdf?src-supplier=Future+Electronics, ComponentLink7Description=https://datasheet.octopart.com:443/RC0805FR-07560RL-Yageo-datasheet-12592811.pdf?src-supplier=Future+Electronics, ComponentLink7URL=https://datasheet.octopart.com:443/RC0805FR-07560RL-Yageo-datasheet-12592811.pdf?src-supplier=Future+Electronics, ComponentLink8Description=https://datasheet.octopart.com:443/RC0805FR-07560RL-Yageo-datasheet-8324252.pdf?src-supplier=Future+Electronics, ComponentLink8URL=https://datasheet.octopart.com:443/RC0805FR-07560RL-Yageo-datasheet-8324252.pdf?src-supplier=Future+Electronics, ComponentLink9Description=https://datasheet.octopart.com:443/RC0805FR-07560RL-Yageo-datasheet-79472498.pdf?src-supplier=Megastar, ComponentLink9URL=https://datasheet.octopart.com:443/RC0805FR-07560RL-Yageo-datasheet-79472498.pdf?src-supplier=Megastar, ComponentLink10Description=https://datasheet.octopart.com/RC0805FR-07560RL-Yageo-datasheet-73766026.pdf, ComponentLink10URL=https://datasheet.octopart.com/RC0805FR-07560RL-Yageo-datasheet-73766026.pdf, ComponentLink11Description=https://datasheet.octopart.com:443/RC0805FR-07560RL-Yageo-datasheet-118657.pdf?src-supplier=DigiKey, ComponentLink11URL=https://datasheet.octopart.com:443/RC0805FR-07560RL-Yageo-datasheet-118657.pdf?src-supplier=DigiKey, ComponentLink12Description=http://sigma.octopart.com:80/conflict_mineral_statement/Yageo-company-3.pdf?src-supplier=Compliance+Statements, ComponentLink12URL=http://sigma.octopart.com:80/conflict_mineral_statement/Yageo-company-3.pdf?src-supplier=Compliance+Statements, ComponentLink13Description=http://sigma.octopart.com:80/rohs_statement/Yageo-company-2.pdf?src-supplier=Compliance+Statements, ComponentLink13URL=http://sigma.octopart.com:80/rohs_statement/Yageo-company-2.pdf?src-supplier=Compliance+Statements, Composition="Thick Film", Depth=1.25mm, Features="Moisture Resistant", Height=500µm, Lead Free="Lead Free", Length=2mm, Lifecycle Status=Production, Manufacturer Part Number=RC0805FR-07560RL, Military Standard=Not, Mount="Surface Mount", Number of Pins=2, Number of Terminals=2, Number of Terminations=2, Packaging="Tape & Reel", Power Dissipation=125mW, Power Rating=125mW, Pricing 1="1=0.1, 10=0.008, 25=0.0072 (USD)", REACH SVHC=Yes, RoHS=Compliant, Schedule B="8533210045, 8533210045|8533210045, 8533210045|8533210045|8533210045, 8533210045|8533210045|8533210045|8533210045", Stock 1=835, Supplier 1=DigiKey, Termination=SMD/SMT, Voltage Rating (AC)=150V, Voltage Rating (DC)=150V, Weight=5.499807mg, Width=1.25mm, Working Voltage=150V